# EAGLE board circle_proximity (EAGLE 7.4.0)
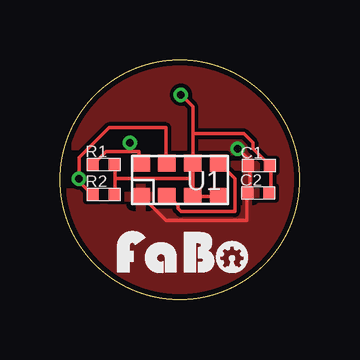
[diagram p0: board, top side]
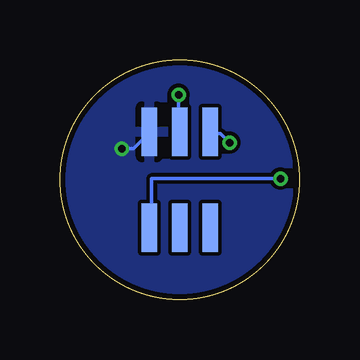
[diagram p1: board, bottom side, seen from below]

Size 10 x 10 mm. Coordinates in mm from the lower left corner, seen from the top.
Copper layers (1*16): Top 0.035mm / dielectric 1.5mm / Bottom 0.035mm
Design rules "Elecrow_2-layer_eagle_rule": minimum track width 6mil, minimum drill 12mil, track to track 6mil, track to pad 6mil, pad to pad 6mil, via to via 6mil, smd to smd 0mil, copper to edge 10mil, drill to drill 10mil, minimum pad ring 10mil, minimum via ring 6mil, stop-mask expansion 2mil, vias tented up to drill 100mil, thermal gap 10mil

## Footprints (pad centres in the part's own frame; a part is rotated, then mirrored left to right if it is on the bottom)
0402 = smd 0.5 x 0.5: P$1 -0.46,0; P$2 0.46,0
VCNL4040M3OE = smd 0.7 x 0.725: 1 0.7,-1.613; 2 0.7,-0.537; 3 0.7,0.537; 4 0.7,1.613; 5 -0.7,1.613; 6 -0.7,0.537; 7 -0.7,-0.537; 8 -0.7,-1.613
FABO-NANO = smd 0.635 x 2.032 bottom: 0 -1.27,2; 1 1.27,-2; 2 0,-2; 3 -1.27,-2; GND 1.27,2; VCC 0,2

## Placement (x,y rotation side)
C1  0.1uf  [0402]  8.3,5.58 0 top
C2  0.1uf  [0402]  8.28,4.44 0 top
R1  4.7K  [0402]  1.82,5.63 0 top
R2  4.7K  [0402]  1.82,4.39 0 top
U1  [VCNL4040M3OE]  5,5 270 top
U$2  FABO-NANO  [FABO-NANO]  5,5 0 top
U$3  [LOGO_FABO_S]  5.18,1.11 0 top

## Library data of the parts
C1 C2 = FaBo-Capacitor
R1 R2 = FaBo-Resistors
U1 = FaBo-Sensor
U$2 = FaBo-Template
U$3 = FaBo-etc

## Nets
3V3: C1.P$2 C2.P$2 R1.P$2 R2.P$2 U1.3 U1.4 U1.6 U$2.VCC
GND: C1.P$1 C2.P$1 U1.1 U$2.GND
N$1: U1.2 U1.5
SCL: R1.P$1 U1.8 U$2.0
SDA: R2.P$1 U1.7 U$2.1

## Tracks (layer width: path | path; a pad name or v marks a point on that pad's centre or on a via)
3V3  (via drill 0.3)
  Top 0.152: 2.29,5.04 2.29,5.54 R1.P$2 | 2.29,5.04 2.29,4.42 R2.P$2 | C2.P$2 8.79,4.54 8.79,5.54 C1.P$2 8.67,5.67 8.04,6.29 8.04,6.54 7.67,6.92 5.54,6.92 | U1.4 6.54,4.29 U1.3 5.54,4.42 5.54,5.04 | 5.54,5.04 5.54,5.67 U1.6 5.54,5.79 5.54,6.92 | 5.54,5.04 2.29,5.04 | v5.04,8.54 5.54,8.04 5.54,6.92
  Bottom 0.152: v5.04,8.54 5.04,7.04 U$2.VCC
GND  (via drill 0.3)
  Top 0.152: U1.1 3.42,4.29 4.42,3.29 7.79,3.29 7.79,4.42 C2.P$1 7.92,4.54 7.92,5.54 C1.P$1 7.79,5.67 7.79,5.92 v7.42,6.29
  Bottom 0.152: v7.42,6.29 6.92,6.29 6.29,6.92 U$2.GND
  pour Bottom: -1.08,-1.08 10.92,-1.08 10.92,10.92 -1.08,10.92
  pour Top: -0.08,-1.08 10.92,-1.08 10.92,10.92 -1.08,10.92 -1.08,-1.08
N$1
  Top 0.152: U1.2 4.54,4.29 4.92,3.92 4.92,3.79 5.04,3.67 7.29,3.67 7.29,5.04 6.67,5.67 U1.5
SCL  (via drill 0.3)
  Top 0.152: 2.92,6.17 3.29,6.17 3.29,5.79 U1.8 | 2.92,6.17 1.92,6.17 1.42,5.67 R1.P$1 | v2.92,6.54 2.92,6.17
  Bottom 0.152: v2.92,6.54 3.29,6.92 3.67,6.92 U$2.0
SDA  (via drill 0.3)
  Top 0.152: R2.P$1 1.29,4.42 0.79,4.92 v0.79,5.04 0.79,5.92 2.04,7.17 4.42,7.17 4.42,5.79 U1.7
  Bottom 0.152: v0.79,5.04 6.17,5.04 6.17,3.04 U$2.1